# EAGLE board pic18f4331-generic (EAGLE 4.16)
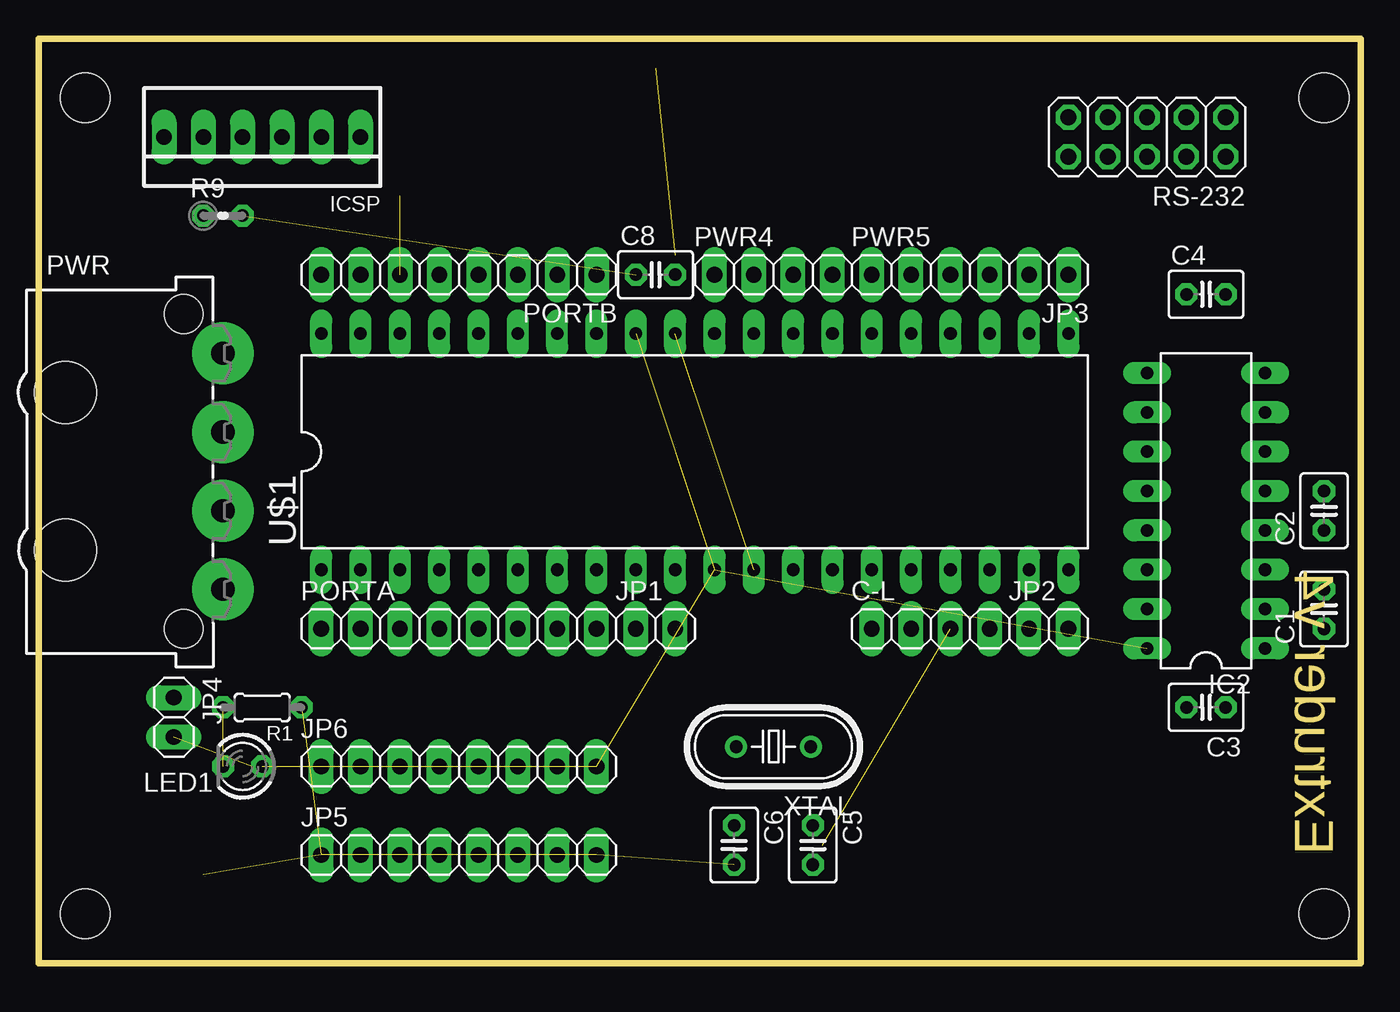
[diagram p0: board, top side]
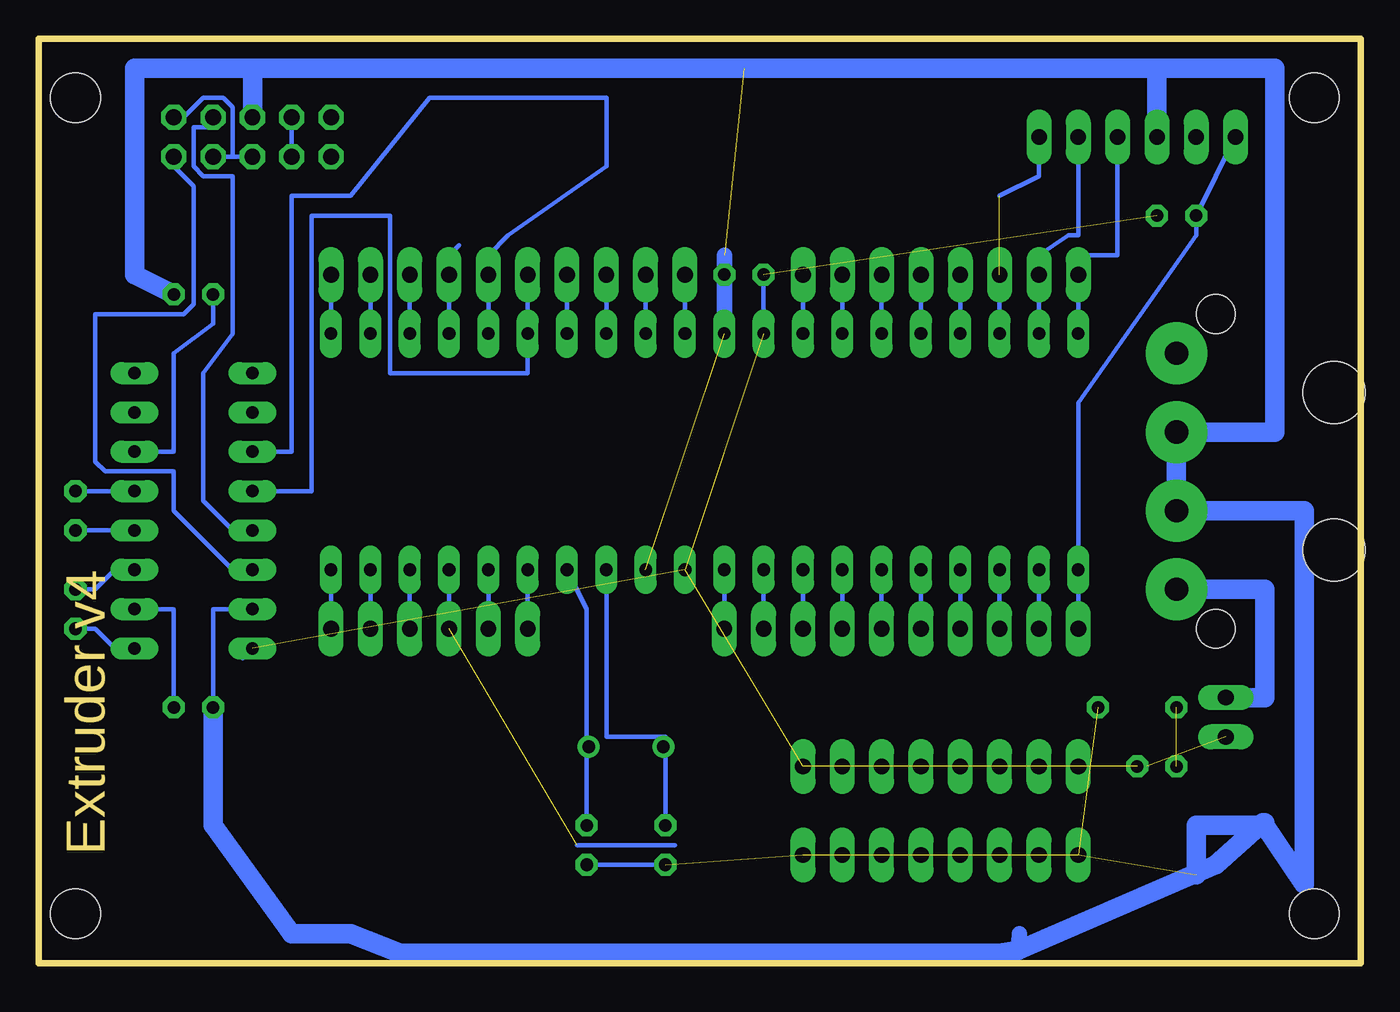
[diagram p1: board, bottom side, seen from below]

Size 85.39 x 59.68 mm. Coordinates in mm from the lower left corner, seen from the top.
Outline: 0,0 85.39,0 85.39,59.68 0,59.68 0,0
Copper layers (1*16): Top 0.035mm / dielectric 1.5mm / Bottom 0.035mm
Design rules "dave": minimum track width 12mil, minimum drill 24mil, track to track 12mil, track to pad 12mil, pad to pad 12mil, via to via 12mil, smd to smd 8mil, copper to edge 40mil, drill to drill 12mil, minimum pad ring 12mil, minimum via ring 12mil, stop-mask expansion 4mil, vias tented up to drill 0mil, thermal gap 10mil
Holes 3.2 mm at 3.01,3.17 83.02,3.17 83.02,55.88 3.01,55.88

## Footprints (pad centres in the part's own frame; a part is rotated, then mirrored left to right if it is on the bottom)
C025-030X050 = drill 0.813 octagon: 1 -1.27,0; 2 1.27,0
1X04 = drill 1.016 long: 1 -3.81,0; 2 -1.27,0; 3 1.27,0; 4 3.81,0
DIL16 = drill 0.813 long: 1 -8.89,-3.81; 2 -6.35,-3.81; 3 -3.81,-3.81; 4 -1.27,-3.81; 5 1.27,-3.81; 6 3.81,-3.81; 7 6.35,-3.81; 8 8.89,-3.81; 9 8.89,3.81; 10 6.35,3.81; 11 3.81,3.81; 12 1.27,3.81; 13 -1.27,3.81; 14 -3.81,3.81; 15 -6.35,3.81; 16 -8.89,3.81
22-23-2061 = drill 1 long: 1 -6.35,0; 2 -3.81,0; 3 -1.27,0; 4 1.27,0; 5 3.81,0; 6 6.35,0
1X02 = drill 1.016 long: 1 -1.27,0; 2 1.27,0
1X08 = drill 1.016 long: 1 -8.89,0; 2 -6.35,0; 3 -3.81,0; 4 -1.27,0; 5 1.27,0; 6 3.81,0; 7 6.35,0; 8 8.89,0
LED3MM = drill 0.813 octagon: A -1.27,0; K 1.27,0
827001 = drill 1.5 pad 4 round: 1 -7.62,0; 2 -2.54,0; 3 2.54,0; 4 7.62,0 | hole 4: 5.08,-10.16; -5.08,-10.16 | hole 2.5: 10.16,-2.54; -10.16,-2.54
0204/5 = drill 0.813 octagon: 1 -2.54,0; 2 2.54,0
0204V = drill 0.813 octagon: 1 -1.27,0; 2 1.27,0
2X05 = drill 1.016 octagon: 1 -5.08,-1.27; 2 -5.08,1.27; 3 -2.54,-1.27; 4 -2.54,1.27; 5 0,-1.27; 6 0,1.27; 7 2.54,-1.27; 8 2.54,1.27; 9 5.08,-1.27; 10 5.08,1.27
DIL40 = drill 0.813 long: 1 -24.13,-7.62; 2 -21.59,-7.62; 3 -19.05,-7.62; 4 -16.51,-7.62; 5 -13.97,-7.62; 6 -11.43,-7.62; 7 -8.89,-7.62; 8 -6.35,-7.62; 9 -3.81,-7.62; 10 -1.27,-7.62; 11 1.27,-7.62; 12 3.81,-7.62; 13 6.35,-7.62; 14 8.89,-7.62; 15 11.43,-7.62; 16 13.97,-7.62; 17 16.51,-7.62; 18 19.05,-7.62; 19 21.59,-7.62; 20 24.13,-7.62; 21 24.13,7.62; 22 21.59,7.62; 23 19.05,7.62; 24 16.51,7.62; 25 13.97,7.62; 26 11.43,7.62; 27 8.89,7.62; 28 6.35,7.62; 29 3.81,7.62; 30 1.27,7.62; 31 -1.27,7.62; 32 -3.81,7.62; 33 -6.35,7.62; 34 -8.89,7.62; 35 -11.43,7.62; 36 -13.97,7.62; 37 -16.51,7.62; 38 -19.05,7.62; 39 -21.59,7.62; 40 -24.13,7.62
HC49U70 = drill 0.813 round: 1 -2.413,0; 2 2.413,0

## Placement (x,y rotation side)
C1  0.1uf  [C025-030X050]  83.02,22.86 90 top
C2  0.33uf  [C025-030X050]  83.02,29.21 90 top
C3  0.33uf  [C025-030X050]  75.4,16.51 180 top
C4  0.33uf  [C025-030X050]  75.4,43.17 0 top
C5  15pf  [C025-030X050]  50,7.62 270 top
C6  15pf  [C025-030X050]  44.92,7.62 270 top
C8  0.1uf  [C025-030X050]  39.84,44.45 0 top
C-L  [1X04]  57.62,21.59 0 top
IC2  MAX3232  [DIL16]  75.4,29.21 90 top
ICSP  [22-23-2061]  14.44,53.34 180 top
JP1  [1X02]  39.84,21.59 0 top
JP2  [1X02]  65.24,21.59 0 top
JP3  [1X02]  65.24,44.45 180 top
JP4  [1X02]  8.73,15.87 270 top
JP5  [1X08]  27.14,6.98 0 top
JP6  [1X08]  27.14,12.69 0 top
LED1  [LED3MM]  13.17,12.69 180 top
PORTA  [1X08]  27.14,21.59 0 top
PORTB  [1X08]  27.14,44.45 180 top
PWR  [827001]  11.9,31.75 270 top
PWR4  [1X04]  47.46,44.45 0 top
PWR5  [1X04]  57.62,44.45 0 top
R1  270  [0204/5]  14.44,16.51 180 top
R9  4.7k  [0204V]  11.9,48.25 0 top
RS-232  [2X05]  71.59,53.34 180 top
U$1  PIC18F4331  [DIL40]  42.38,33.02 0 top
XTAL  [HC49U70]  47.46,13.96 180 top

## Library data of the parts
C1-C6 C8 R1 R9 = rcl
C-L JP1-JP3 PWR4 PWR5 RS-232 = pinhead
IC2 = maxim-9
ICSP = con-molex
JP4-JP6 PORTA PORTB = pinhead-1
LED1 = led
PWR = con-amp
U$1 = microchip-pic18fxx5x
XTAL = crystal

## Nets
GND: C3.2 C4.2 C5.2 C6.2 C8.2 IC2.15 ICSP.4 JP5.1 JP5.2 JP5.3 JP5.4 JP5.5 JP5.6 JP5.7 JP5.8 PWR.2 PWR.3 R1.1 RS-232.5 U$1.12 U$1.31
LIMIT1: C-L.2 U$1.16
LIMIT2: C-L.3 U$1.17
N$1: C1.1 IC2.1
N$2: JP4.1 PWR.4
N$3: PWR5.4 U$1.23
N$4: C1.2 IC2.3
N$5: C2.1 IC2.4
N$6: C2.2 IC2.5
N$7: C3.1 IC2.2
N$8: C4.1 IC2.6
N$10: C-L.1 U$1.15
N$11: PORTA.2 U$1.2
N$15: ICSP.1 PORTB.6 U$1.38
N$16: ICSP.2 PORTB.7 U$1.39
N$17: ICSP.3 PORTB.8 U$1.40
N$18: PORTA.7 U$1.7
N$19: PORTA.6 U$1.6
N$20: PORTA.5 U$1.5
N$21: PORTA.4 U$1.4
N$23: JP2.1 U$1.19
N$24: C5.1 U$1.14 XTAL.1
N$25: C6.1 U$1.13 XTAL.2
N$26: IC2.12 PWR5.1 U$1.26
N$27: IC2.11 PWR5.2 U$1.25
N$28: PORTA.8 U$1.8
N$29: JP1.1 U$1.9
N$30: JP1.2 U$1.10
N$31: PORTB.1 U$1.33
N$32: PORTB.3 U$1.35
N$35: C-L.4 U$1.18
N$36: JP3.1 U$1.21
N$37: JP3.2 U$1.22
N$38: PWR4.3 U$1.28
N$40: JP2.2 U$1.20
N$41: PWR5.3 U$1.24
N$42: PWR4.4 U$1.27
N$43: PWR4.2 U$1.29
N$44: PWR4.1 U$1.30
N$45: ICSP.6 PORTA.1 R9.1 U$1.1
N$50: LED1.K R1.2
N$53: RS-232.7 RS-232.8
N$54: PORTB.4 U$1.36
N$56: PORTB.5 U$1.37
N$59: RS-232.1 RS-232.4 RS-232.6
N$61: IC2.14 RS-232.2
N$62: IC2.13 RS-232.3
N$165: PORTA.3 U$1.3
N$172: PORTB.2 U$1.34
VCC: C8.1 IC2.16 JP4.2 JP6.1 JP6.2 JP6.3 JP6.4 JP6.5 JP6.6 JP6.7 JP6.8 LED1.A R9.2 U$1.11 U$1.32
VDD: ICSP.5

## Tracks (layer width: path | path; a pad name or v marks a point on that pad's centre or on a via)
GND  (12 unrouted)
  Bottom 0.305: C6.2 C5.2 | IC2.15 74.13,22.86 C3.2 | PWR.3 12.54,27.94
  Bottom 1.016: U$1.31 C8.2 41.11,45.71 | 22.12,0.82 22.06,1.9
  Bottom 1.27: 10.63,5.71 10.63,8.88 6.18,8.88 6.18,9.04 6.33,9.04 | C3.2 74.13,8.88 69.05,1.9 65.24,1.9 62.06,0.63 23.33,0.63 22.12,0.82 9.36,6.34 6.33,9.04 | 71.59,57.78 79.21,57.78 79.21,44.45 C4.2 | 13.17,57.78 5.55,57.78 5.55,34.28 PWR.2 PWR.3 3.65,29.21 3.65,5.08 6.33,9.04 | 13.17,57.78 ICSP.4 | 13.17,57.78 39.84,57.78 71.59,57.78 | 71.59,57.78 RS-232.5
LIMIT1
  Bottom 0.305: C-L.2 U$1.16
LIMIT2  (1 unrouted)
  Bottom 0.305: C-L.3 U$1.17 | 44.29,7.62 50.63,7.62
N$1
  Bottom 0.305: IC2.1 80.48,20.32 81.75,21.59 C1.1
N$2
  Bottom 1.27: JP4.1 6.18,17.14 6.18,24.12 PWR.4
N$3
  Bottom 0.305: U$1.23 PWR5.4
N$4
  Bottom 0.305: IC2.3 80.48,25.39 81.75,24.12 C1.2
N$5
  Bottom 0.305: IC2.4 C2.1
N$6
  Bottom 0.305: IC2.5 C2.2
N$7
  Bottom 0.305: C3.1 76.67,22.86 IC2.2
N$8
  Bottom 0.305: C4.1 74.13,41.27 76.67,39.36 76.67,33.02 IC2.6
N$10
  Bottom 0.305: C-L.1 U$1.15
N$11
  Bottom 0.305: PORTA.2 U$1.2
N$15  (1 unrouted)
  Bottom 0.305: U$1.38 PORTB.6 | ICSP.1 20.79,50.79 23.33,49.52
N$16
  Bottom 0.305: U$1.39 PORTB.7 20.79,45.71 18.89,46.98 18.25,46.98 ICSP.2
N$17
  Bottom 0.305: U$1.40 PORTB.8 17.62,45.71 15.71,45.71 ICSP.3
N$18
  Bottom 0.305: PORTA.7 U$1.7
N$19
  Bottom 0.305: PORTA.6 U$1.6
N$20
  Bottom 0.305: PORTA.5 U$1.5
N$21
  Bottom 0.305: PORTA.4 U$1.4
N$23
  Bottom 0.305: JP2.1 U$1.19
N$24
  Bottom 0.305: C5.1 50,13.33 XTAL.1 50,14.6 50,22.86 U$1.14
N$25
  Bottom 0.305: C6.1 44.92,13.33 XTAL.2 44.92,14.6 48.73,14.6 U$1.13
N$26
  Bottom 0.305: PWR5.1 U$1.26 53.81,38.09 62.7,38.09 62.7,48.25 67.78,48.25 67.78,30.48 IC2.12
N$27
  Bottom 0.305: U$1.25 PWR5.2 56.35,45.71 55.08,46.98 48.73,51.43 48.73,55.88 60.16,55.88 65.24,49.52 69.05,49.52 69.05,33.02 IC2.11
N$28
  Bottom 0.305: PORTA.8 U$1.8
N$29
  Bottom 0.305: JP1.1 U$1.9
N$30
  Bottom 0.305: JP1.2 U$1.10
N$31
  Bottom 0.305: U$1.33 PORTB.1
N$32
  Bottom 0.305: U$1.35 PORTB.3 30.95,45.71
N$35
  Bottom 0.305: C-L.4 U$1.18
N$36
  Bottom 0.305: U$1.21 JP3.1
N$37
  Bottom 0.305: U$1.22 JP3.2
N$38
  Bottom 0.305: U$1.28 PWR4.3
N$40
  Bottom 0.305: JP2.2 U$1.20
N$41
  Bottom 0.305: U$1.24 PWR5.3 58.89,45.71 58.26,46.35
N$42
  Bottom 0.305: U$1.27 PWR4.4
N$43
  Bottom 0.305: U$1.29 PWR4.2
N$44
  Bottom 0.305: U$1.30 PWR4.1
N$45
  Bottom 0.305: PORTA.1 U$1.1 18.25,36.19 10.63,46.98 R9.1 ICSP.6
N$50  (1 unrouted)
N$53
  Bottom 0.305: RS-232.8 RS-232.7
N$54
  Bottom 0.305: U$1.36 PORTB.4
N$56
  Bottom 0.305: U$1.37 PORTB.5
N$59
  Bottom 0.305: RS-232.6 72.86,52.06 | 72.86,52.06 RS-232.4 | 72.86,52.06 72.86,55.24 73.49,55.88 74.77,55.88 76.03,54.6 RS-232.1
N$61
  Bottom 0.305: IC2.14 72.86,25.39 76.67,29.21 76.67,31.75 81.11,31.75 81.75,32.38 81.75,41.9 76.03,41.9 75.4,42.54 75.4,50.16 76.67,51.43 RS-232.2
N$62
  Bottom 0.305: IC2.13 72.86,27.94 74.77,29.84 74.77,38.09 72.86,40.63 72.86,50.79 74.77,50.79 75.4,51.43 75.4,53.97 74.13,53.97 RS-232.3
N$165
  Bottom 0.305: PORTA.3 U$1.3
N$172
  Bottom 0.305: U$1.34 PORTB.2
VCC  (13 unrouted)
  Bottom 0.305: IC2.16 72.22,19.68 | LED1.A 13.81,12.69 | U$1.32 C8.1

## Text on the board
Dimension: Extruder v4